# EAGLE board sch_v.1 (EAGLE 9.4.2)

Size 76.2 x 76.2 mm. Coordinates in mm from the lower left corner, seen from the top.
Outline: circle at 38.1,38.1 radius 38.1
Copper layers (1*16): Top 0.035mm / dielectric 1.5mm / Bottom 0.035mm
Design rules "default": minimum track width 6mil, minimum drill 0.35mm, track to track 6mil, track to pad 6mil, pad to pad 6mil, via to via 6mil, smd to smd 6mil, copper to edge 40mil, drill to drill 6mil, minimum pad ring 10mil, minimum via ring 8mil, stop-mask expansion 4mil, vias tented up to drill 0mil, thermal gap 10mil

## Footprints (pad centres in the part's own frame; a part is rotated, then mirrored left to right if it is on the bottom)
0805-NO@1 = smd 1.24 x 1.5: 1 -0.95,0; 2 0.95,0
1X06 = drill 1.016 octagon: 1 -6.35,0; 2 -3.81,0; 3 -1.27,0; 4 1.27,0; 5 3.81,0; 6 6.35,0
JSTPH2 = smd 1 x 4.6: 1 -0.965,-3.607; 2 0.965,-3.607 | smd 1.651 x 3.505: SHLD1 -3.4,1.473; SHLD2 3.4,1.473
RESC0402_N = smd 0.6 x 0.6: 1 -0.55,0; 2 0.55,0
PICO-D4-QFN48 = smd 0.66 x 0.3: 1 -3.327,2.75; 2 -3.327,2.25; 3 -3.327,1.75; 4 -3.327,1.25; 5 -3.327,0.75; 6 -3.327,0.25; 7 -3.327,-0.25; 8 -3.327,-0.75; 9 -3.327,-1.25; 10 -3.327,-1.75; 11 -3.327,-2.25; 12 -3.327,-2.75; 25 3.327,-2.75; 26 3.327,-2.25; 27 3.327,-1.75; 28 3.327,-1.25; 29 3.327,-0.75; 30 3.327,-0.25; 31 3.327,0.25; 32 3.327,0.75; 33 3.327,1.25; 34 3.327,1.75; 35 3.327,2.25; 36 3.327,2.75 | smd 0.3 x 0.66: 13 -2.75,-3.327; 14 -2.25,-3.327; 15 -1.75,-3.327; 16 -1.25,-3.327; 17 -0.75,-3.327; 18 -0.25,-3.327; 19 0.25,-3.327; 20 0.75,-3.327; 21 1.25,-3.327; 22 1.75,-3.327; 23 2.25,-3.327; 24 2.75,-3.327; 37 2.75,3.327; 38 2.25,3.327; 39 1.75,3.327; 40 1.25,3.327; 41 0.75,3.327; 42 0.25,3.327; 43 -0.25,3.327; 44 -0.75,3.327; 45 -1.25,3.327; 46 -1.75,3.327; 47 -2.25,3.327; 48 -2.75,3.327 | smd 4.572 x 4.572: EXP 0,0
DUAL_NPN_SC70-6 = smd 0.3 x 0.66: 1 -0.65,-0.92; 2 0,-0.92; 3 0.65,-0.92; 4 0.65,0.92; 5 0,0.92; 6 -0.65,0.92
0805-NO = smd 1.3 x 1.5: 1 -0.95,0; 2 0.95,0
SW_MLL1200S = smd 0.7 x 1.1: 1 -2.25,2.05; 2 0.75,2.05; 3 2.25,2.05 | smd 1 x 0.8: G1 -3.75,1.15; G2 3.75,1.15; G3 -3.75,-1.15; G4 3.75,-1.15 | hole 0.9: -1.5,0; 1.5,0
VREG_NCP170AMX300TCG = smd 0.152 x 0.152: 1 -0.45,0.3; 2 -0.45,-0.3; 3 0.45,-0.3; 4 0.45,0.3 | smd 0.483 x 0.483 rotated 315: 5 0,0
SOIC127P600X175-14N = smd 1.97 x 0.6: 1 -2.475,3.81; 2 -2.475,2.54; 3 -2.475,1.27; 4 -2.475,0; 5 -2.475,-1.27; 6 -2.475,-2.54; 7 -2.475,-3.81; 8 2.475,-3.81; 9 2.475,-2.54; 10 2.475,-1.27; 11 2.475,0; 12 2.475,1.27; 13 2.475,2.54; 14 2.475,3.81
MSOP8_0.65MM = smd 0.4 x 1.4: 1 -0.975,-2.2; 2 -0.325,-2.2; 3 0.325,-2.2; 4 0.975,-2.2; 5 0.975,2.2; 6 0.325,2.2; 7 -0.325,2.2; 8 -0.975,2.2
PRO-OB-440 = smd 0.8 x 0.86: FEED 8.9,-4.4; GND 11.1,-4.4; P$3 11.1,-0.83; P$4 0.4,-0.83
TERMBLOCK_1X2-3.5MM = drill 1 pad 2.184: 1 1.8,0; 2 -1.7,0

## Placement (x,y rotation side)
C1  0.01uF  [0805-NO@1]  -24.38,49.78 0 top  (outside the outline)
C2  0.1uF  [0805-NO@1]  -16.76,54.86 0 top  (outside the outline)
C3  0.01uF  [0805-NO@1]  -30.73,49.78 0 top  (outside the outline)
C4  0.01uF  [0805-NO@1]  -37.08,49.78 0 top  (outside the outline)
C5  0.1uF  [0805-NO@1]  -23.11,54.86 0 top  (outside the outline)
C6  0.01uF  [0805-NO@1]  -43.43,49.78 0 top  (outside the outline)
C7  0.1µF  [0805-NO@1]  -29.46,54.86 0 top  (outside the outline)
C8  0.1µF  [0805-NO@1]  -35.81,54.86 0 top  (outside the outline)
C9  0.01uF  [0805-NO@1]  -49.78,49.78 0 top  (outside the outline)
C10  0.1uF  [0805-NO@1]  -49.78,39.62 0 top  (outside the outline)
C11  0.01uF  [0805-NO@1]  -18.03,49.78 0 top  (outside the outline)
C12  0.1µF  [0805-NO@1]  -56.13,39.62 0 top  (outside the outline)
C13  0.01uF  [0805-NO@1]  -18.03,42.16 0 top  (outside the outline)
C14  0.1uF  [0805-NO@1]  -24.38,42.16 0 top  (outside the outline)
C15  0.01uF  [0805-NO@1]  -30.73,42.16 0 top  (outside the outline)
C16  0.1µF  [0805-NO@1]  -37.08,42.16 0 top  (outside the outline)
C17  1.5pF  [0805-NO@1]  -43.43,42.16 0 top  (outside the outline)
C18  0.1uF  [0805-NO@1]  -49.78,42.16 0 top  (outside the outline)
C19  0.1µF  [0805-NO@1]  -56.13,42.16 0 top  (outside the outline)
C20  1uF  [0805-NO@1]  -18.03,44.7 0 top  (outside the outline)
C21  10nF  [0805-NO@1]  -24.38,44.7 0 top  (outside the outline)
C22  100nF  [0805-NO@1]  -30.73,44.7 0 top  (outside the outline)
C23  100nF  [0805-NO@1]  -37.08,44.7 0 top  (outside the outline)
C24  10nF  [0805-NO@1]  -43.43,44.7 0 top  (outside the outline)
C25  100nF  [0805-NO@1]  -49.78,44.7 0 top  (outside the outline)
C26  10nF  [0805-NO@1]  -56.13,44.7 0 top  (outside the outline)
C27  10nF  [0805-NO@1]  -18.03,47.24 0 top  (outside the outline)
C28  100nF  [0805-NO@1]  -24.38,47.24 0 top  (outside the outline)
C29  10uF  [0805-NO@1]  -30.73,47.24 0 top  (outside the outline)
C30  0.1µF  [0805-NO@1]  -37.08,47.24 0 top  (outside the outline)
C31  0.75pF  [0805-NO@1]  -43.43,47.24 0 top  (outside the outline)
C32  1uF  [0805-NO@1]  -49.78,47.24 0 top  (outside the outline)
JP2  [1X06]  -53.59,-9.91 0 top  (outside the outline)
JST-LIPO  LIPO  [JSTPH2]  -28.19,14.22 0 top  (outside the outline)
L1  7.5nH  [RESC0402_N]  -43.43,30.73 0 top  (outside the outline)
PICO-D4  ESP32-PICO-D4  [PICO-D4-QFN48]  -52.32,0.25 0 top  (outside the outline)
Q1  MUN5214DW1T1G  [DUAL_NPN_SC70-6]  -48.51,30.73 0 top  (outside the outline)
R1  100  [0805-NO]  -56.13,49.78 0 top  (outside the outline)
R2  100  [0805-NO]  -16.76,52.32 0 top  (outside the outline)
R3  1M  [0805-NO]  -23.11,52.32 0 top  (outside the outline)
R4  100  [0805-NO]  -29.46,52.32 0 top  (outside the outline)
R5  100  [0805-NO]  -35.81,52.32 0 top  (outside the outline)
R6  1M  [0805-NO]  -42.16,52.32 0 top  (outside the outline)
R7  100  [0805-NO]  -48.51,52.32 0 top  (outside the outline)
R8  100  [0805-NO]  -54.86,52.32 0 top  (outside the outline)
R9  1M  [0805-NO]  -61.21,52.32 0 top  (outside the outline)
R10  150k  [0805-NO]  -18.03,37.08 0 top  (outside the outline)
R11  2.5M  [0805-NO]  -56.13,47.24 0 top  (outside the outline)
R12  150k  [0805-NO]  -24.38,37.08 0 top  (outside the outline)
R13  100  [0805-NO]  -14.73,2.29 0 top  (outside the outline)
R14  100  [0805-NO]  -37.08,37.08 0 top  (outside the outline)
R15  1M  [0805-NO]  -43.43,37.08 0 top  (outside the outline)
R16  2.5M  [0805-NO]  -49.78,37.08 0 top  (outside the outline)
R17  150k  [0805-NO]  -56.13,37.08 0 top  (outside the outline)
R18  2.5M  [0805-NO]  -18.03,39.62 0 top  (outside the outline)
R19  150k  [0805-NO]  -24.38,39.62 0 top  (outside the outline)
R20  2.5M  [0805-NO]  -30.73,39.62 0 top  (outside the outline)
R21  10k  [0805-NO]  -37.08,39.62 0 top  (outside the outline)
R22  10K  [0805-NO]  -43.43,39.62 0 top  (outside the outline)
SW1  MLL1200S  [SW_MLL1200S]  -18.03,12.95 0 top  (outside the outline)
U1  NCP170AMX300TCG  [VREG_NCP170AMX300TCG]  -56.13,30.73 0 top  (outside the outline)
U2  LM324  [SOIC127P600X175-14N]  -35.81,0.25 0 top  (outside the outline)
U3  AD8495ARMZ  [MSOP8_0.65MM]  -16.76,32 0 top  (outside the outline)
U4  AD8495ARMZ  [MSOP8_0.65MM]  -23.11,32 0 top  (outside the outline)
U5  AD8495ARMZ  [MSOP8_0.65MM]  -29.46,32 0 top  (outside the outline)
U6  AD8495ARMZ  [MSOP8_0.65MM]  -35.81,32 0 top  (outside the outline)
U$35  PRO-OB-440  [PRO-OB-440]  -61.21,24.38 0 top  (outside the outline)
X1  3.5mm terminal  [TERMBLOCK_1X2-3.5MM]  37.85,72.64 0 top
X2  3.5mm terminal  [TERMBLOCK_1X2-3.5MM]  3.56,37.85 90 top
X3  3.5mm terminal  [TERMBLOCK_1X2-3.5MM]  72.64,38.1 270 top
X4  3.5mm terminal  [TERMBLOCK_1X2-3.5MM]  38.1,3.56 180 top

## Library data of the parts
C1-C32 R1-R22 U3-U6 X1-X4 = microbuilder
JP2 = adafruit
JST-LIPO PICO-D4 U$35 = UnexpectedMaker
L1 = Nordic_nRF
Q1 = UnexpectedMaker; PROD_ID: TRANS-13337
SW1 = MLL1200S; AVAILABILITY: Unavailable; COMMENT: 1437575-1; DESCRIPTION: Slide Switch SPDT Surface Mount, Right Angle; MF: TE Connectivity; MP: MLL1200S; PACKAGE: None; PRICE: None; TE_PURCHASE_URL: https://www.te.com/usa-en/product-1437575-1.html?te_bu=Cor&te_type=disp&te_campaign=seda_glo_cor-seda-global-disp-prtnr-fy19-seda-model-bom-cta_sma-317_1&elqCampaignId=32493
U1 = NCP170AMX300TCG; AVAILABILITY: Unavailable; DESCRIPTION: Fixed LDO Voltage Regulator, 2.2V to 5.5V, 190mV Dropout, 3Vout, 150mAout, XDFN-4; MF: ON Semiconductor; MP: NCP170AMX300TCG; PACKAGE: XDFN-4 ON Semiconductor; PRICE: None
U2 = LM324; AVAILABILITY: Unavailable; DESCRIPTION: these devices consist of four independent high-gain frequency-compensated operational amplifiers that are designed sp...; MF: Texas Instruments; MP: LM324; PACKAGE: SOIC-14 Texas Instruments; PRICE: None

## Nets
ANT: C17.1 L1.2 U$35.FEED
DTR: JP2.1 Q1.1 Q1.5
GND: C1.2 C3.1 C4.2 C6.1 C7.1 C8.1 C9.2 C11.1 C12.1 C13.2 C15.1 C16.1 C18.2 C19.2 C20.2 C21.2 C24.2 C26.2 C27.2 C29.2 C30.2 C31.1 C32.2 JP2.5 JST-LIPO.1 JST-LIPO.SHLD1 JST-LIPO.SHLD2 L1.1 PICO-D4.EXP R3.1 R6.1 R9.1 R15.1 SW1.G1 SW1.G2 SW1.G3 SW1.G4 U1.2 U1.5 U2.11 U3.2 U3.3 U4.2 U4.3 U5.2 U5.3 U6.2 U6.3 U$35.GND
GPIO0: PICO-D4.23 Q1.6
GPIO25: C23.2 U2.6 U2.7
GPIO26: C25.2 U2.8 U2.9
GPIO27: C28.2 U2.13 U2.14
GPIO33: C22.2 U2.1 U2.2
IN+: R13.1 X1.2
IN+1: R1.1 X2.2
IN+2: R4.1 X3.2
IN+3: R7.1 X4.2
IN-: R14.1 R15.2 X1.1
IN-1: R2.1 R3.2 X2.1
IN-2: R5.1 R6.2 X3.1
IN-3: R8.1 R9.2 X4.1
IO12: PICO-D4.18
IO21: PICO-D4.42
LNA_IN: C17.2 C31.2 PICO-D4.2
N$1: C2.1 C3.2 R1.2 U4.8
N$2: C5.1 C6.2 R13.2 U3.8
N$3: C4.1 C5.2 R14.2
N$4: U3.1
N$5: C1.1 C2.2 R2.2 U4.1
N$7: C10.1 C11.2 R4.2 U5.8
N$8: C9.1 C10.2 R5.2
N$9: U5.1
N$10: C14.1 C15.2 R7.2 U6.8
N$11: C13.1 C14.2 R8.2
N$12: U6.1
N$13: JST-LIPO.2 SW1.2
N$14: C22.1 R10.2 R11.1
N$15: PICO-D4.13
N$16: C21.1 R11.2 U2.3
N$17: C24.1 R16.2 U2.5
N$18: C23.1 R12.2 R16.1
N$19: PICO-D4.14
N$20: C25.1 R17.2 R18.1
N$21: C28.1 R19.2 R20.1
N$22: C26.1 R18.2 U2.10
N$23: C27.1 R20.2 U2.12
N$24: PICO-D4.15
N$25: PICO-D4.16
N$26: PICO-D4.10 PICO-D4.11 R21.2
RESET: C30.1 PICO-D4.9 Q1.3 R22.1
RTS: JP2.2 Q1.2 Q1.4
RXD: JP2.4 PICO-D4.40
SENSOR_CAPN: PICO-D4.7
TXD: JP2.3 PICO-D4.41
VBATT: C32.1 SW1.1 U1.3 U1.4
VCC: C7.2 C8.2 C12.2 C16.2 C18.1 C19.1 C20.1 C29.1 JP2.6 PICO-D4.1 PICO-D4.3 PICO-D4.4 PICO-D4.19 PICO-D4.37 PICO-D4.43 PICO-D4.46 R21.1 R22.2 U1.1 U2.4 U3.7 U4.7 U5.7 U6.7
VOUT1: R10.1 U4.5 U4.6
VOUT2: R12.1 U3.5 U3.6
VOUT3: R17.1 U5.5 U5.6
VOUT4: R19.1 U6.5 U6.6

## Tracks (layer width: path | path; a pad name or v marks a point on that pad's centre or on a via)
ANT  (2 unrouted)
DTR  (2 unrouted)
GND  (48 unrouted)
GPIO0  (1 unrouted)
GPIO25  (2 unrouted)
GPIO26  (2 unrouted)
GPIO27  (2 unrouted)
GPIO33  (2 unrouted)
IN+  (1 unrouted)
IN+1  (1 unrouted)
IN+2  (1 unrouted)
IN+3  (1 unrouted)
IN-  (2 unrouted)
IN-1  (2 unrouted)
IN-2  (2 unrouted)
IN-3  (2 unrouted)
LNA_IN  (2 unrouted)
N$1  (3 unrouted)
N$2  (3 unrouted)
N$3  (2 unrouted)
N$5  (3 unrouted)
N$7  (3 unrouted)
N$8  (2 unrouted)
N$10  (3 unrouted)
N$11  (2 unrouted)
N$13  (1 unrouted)
N$14  (2 unrouted)
N$16  (2 unrouted)
N$17  (2 unrouted)
N$18  (2 unrouted)
N$20  (2 unrouted)
N$21  (2 unrouted)
N$22  (2 unrouted)
N$23  (2 unrouted)
N$26  (2 unrouted)
RESET  (3 unrouted)
RTS  (2 unrouted)
RXD  (1 unrouted)
TXD  (1 unrouted)
VBATT  (3 unrouted)
VCC  (23 unrouted)
VOUT1  (2 unrouted)
VOUT2  (2 unrouted)
VOUT3  (2 unrouted)
VOUT4  (2 unrouted)